# EAGLE board tulip breakout (EAGLE 9.6.2)
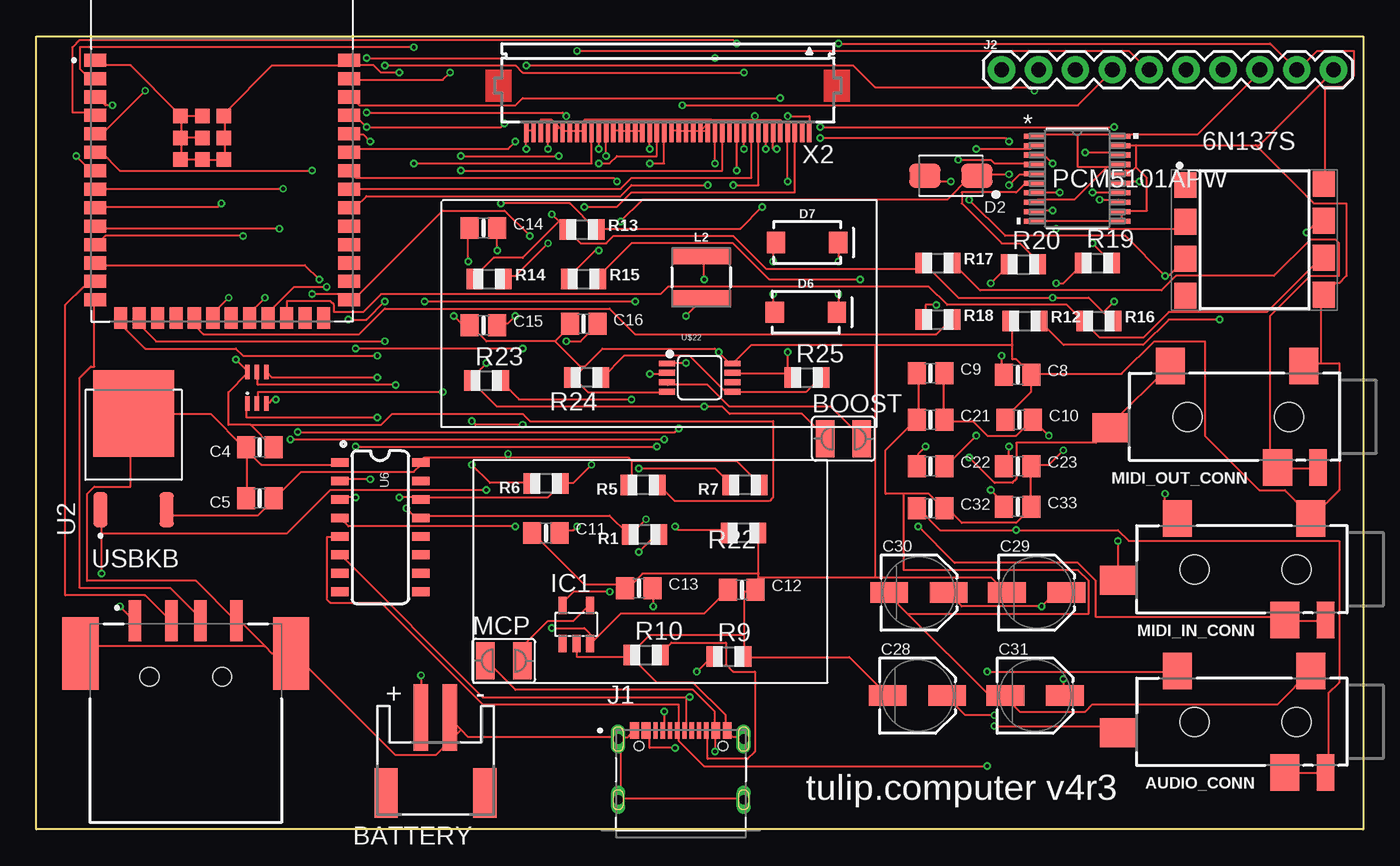
[diagram p0: board, top side]
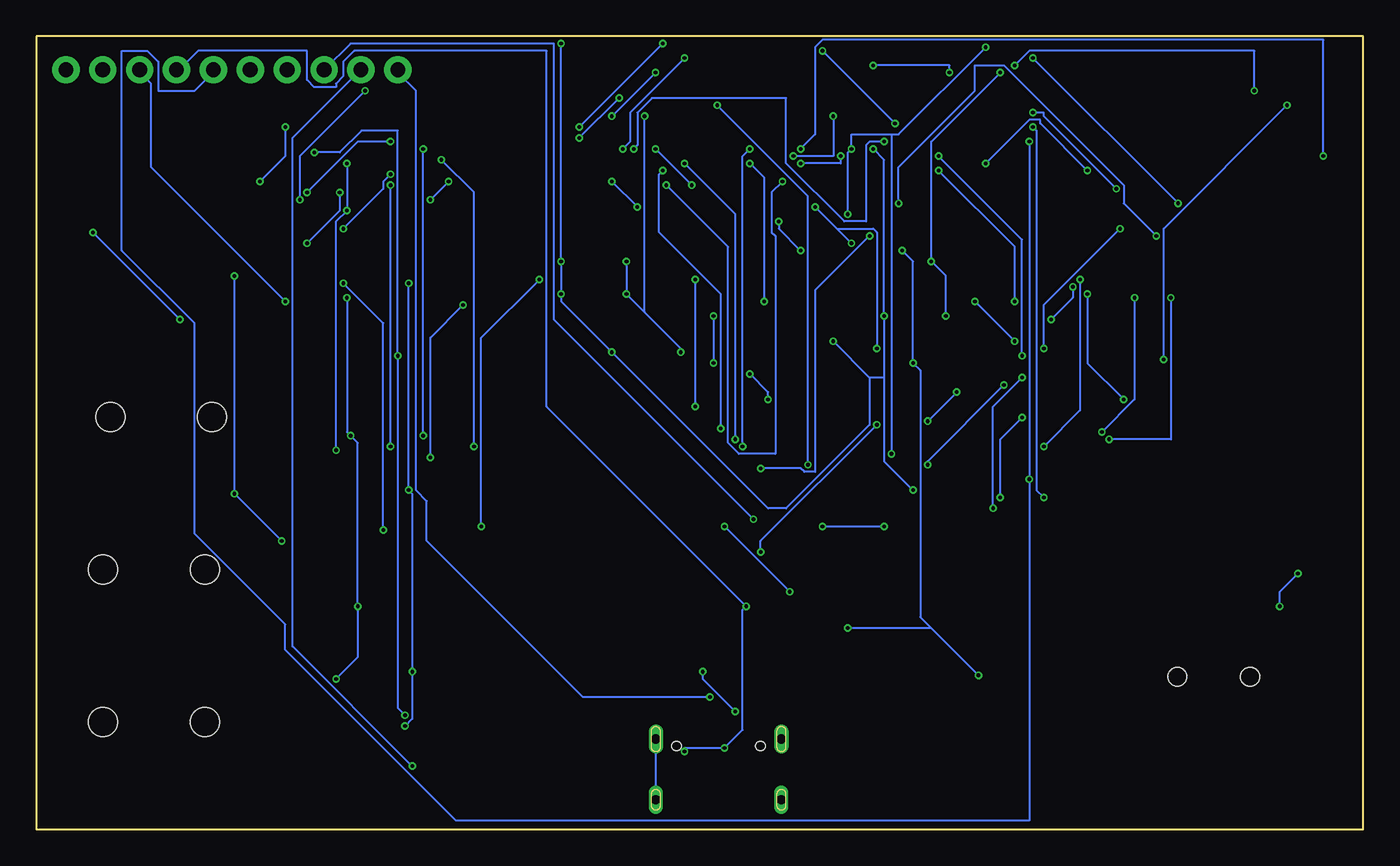
[diagram p1: board, bottom side, seen from below]

Size 91.4 x 54.6 mm. Coordinates in mm from the lower left corner, seen from the top.
Outline: 0,0 0,54.6 91.4,54.6 91.4,0 0,0
Copper layers (1*16): Top 0.035559375mm / dielectric 1.6mm / Bottom 0.035559375mm
Design rules "oshpark-2layer *": minimum track width 6mil, minimum drill 10mil, track to track 6mil, track to pad 6mil, pad to pad 6mil, via to via 6mil, smd to smd 6mil, copper to edge 0mil, drill to drill 6mil, minimum pad ring 5mil, minimum via ring 5mil, stop-mask expansion 2.5mil, vias tented up to drill 0mil, thermal gap 10mil
Net classes: 1 power: width 0.178 mm

## Footprints (pad centres in the part's own frame; a part is rotated, then mirrored left to right if it is on the bottom)
8-SMD = smd 1.52 x 1.78: 1 -4.96,3.96; 2 -4.96,1.42; 3 -4.96,-1.12; 4 -4.96,-3.66; 5 4.58,-3.59; 6 4.58,-1.05; 7 4.58,1.49; 8 4.58,4.03
4UCONN_19269 = smd 2 x 2.5: 1 2.5,-3.5; 2 11.7,-3.5; 3 4.3,3.5 | smd 2.5 x 2: 4 15.8,0.75 | smd 1.2 x 2.5: 5 1.5,3.5 | hole 2: 3.5,0; 10.5,0
JST-PH-2-SMT-RA = smd 1 x 4.6: 1 1,-3.7; 2 -1,-3.7 | smd 1.6 x 3.4: NC1 -3.4,1.5; NC2 3.4,1.5
SJW = smd 1.27 x 2.54: 1 -1.27,0; 2 1.27,0
0805-NO = smd 1.24 x 1.5: 1 -0.95,0; 2 0.95,0
PANASONIC_C = smd 2.6 x 1.4: + 2.05,0; - -2.05,0
DIOM449X264X300L114X135N = smd 2.17 x 1.69: A 1.795,0; C -1.795,0
SMA-DIODE = smd 1.27 x 1.47: A -2.15,0; C 2.15,0
SOT23-5L = smd 0.55 x 1.2: 1 -0.95,-1.3; 2 0,-1.3; 3 0.95,-1.3; 4 0.95,1.3; 5 -0.95,1.3
VALCON_CSP-USC16-TR = smd 0.3 x 1.14: A1 -3.35,0; A4 -2.55,0; A5 -1.25,0; A6 -0.25,0; A7 0.25,0; A8 1.25,0; A9 2.55,0; A12 3.35,0; B1 3.05,0; B4 2.25,0; B5 1.75,0; B6 0.75,0; B7 -0.75,0; B8 -1.75,0; B9 -2.25,0; B12 -3.05,0 | drill 0.65 pad 1 long: S1 -4.325,-0.59; S2 4.325,-0.59 | drill 0.65 pad 0.9 long: S3 -4.325,-4.77; S4 4.325,-4.77 | hole 0.65: -2.89,-1.07; 2.89,-1.07
1X10 = drill 1.016 pad 1.88: 1 0,0; 2 2.54,0; 3 5.08,0; 4 7.62,0; 5 10.16,0; 6 12.7,0; 7 15.24,0; 8 17.78,0; 9 20.32,0; 10 22.86,0
INDUCTOR_4X4MM = smd 4.089 x 1.143: P$1 0,1.473; P$2 0,-1.473
R0805 = smd 1.1 x 1.4: 1 -1,0; 2 1,0
SOT236 = smd 0.3 x 1: 1 -0.66,-1.09; 2 0,-1.09; 3 0.66,-1.09; 4 0.66,1.09; 5 0,1.09; 6 -0.66,1.09
XCVR_ESP32-S3-WROOM-2-N32R8V = smd 1.5 x 0.9: 1 -8.75,5.26; 2 -8.75,3.99; 3 -8.75,2.72; 4 -8.75,1.45; 5 -8.75,0.18; 6 -8.75,-1.09; 7 -8.75,-2.36; 8 -8.75,-3.63; 9 -8.75,-4.9; 10 -8.75,-6.17; 11 -8.75,-7.44; 12 -8.75,-8.71; 13 -8.75,-9.98; 14 -8.75,-11.25; 27 8.75,-11.25; 28 8.75,-9.98; 29 8.75,-8.71; 30 8.75,-7.44; 31 8.75,-6.17; 32 8.75,-4.9; 33 8.75,-3.63; 34 8.75,-2.36; 35 8.75,-1.09; 36 8.75,0.18; 37 8.75,1.45; 38 8.75,2.72; 39 8.75,3.99; 40 8.75,5.26 | smd 0.9 x 1.5: 15 -6.985,-12.5; 16 -5.715,-12.5; 17 -4.445,-12.5; 18 -3.175,-12.5; 19 -1.905,-12.5; 20 -0.635,-12.5; 21 0.635,-12.5; 22 1.905,-12.5; 23 3.175,-12.5; 24 4.445,-12.5; 25 5.715,-12.5; 26 6.985,-12.5 | smd 1 x 1: 41_1 -1.36,-0.09; 41_2 -2.86,-0.09; 41_3 0.14,-0.09; 41_4 -2.86,-1.59; 41_5 -1.36,-1.59; 41_6 0.14,-1.59; 41_7 -2.86,1.41; 41_8 -1.36,1.41; 41_9 0.14,1.41
DPAK456P972X240-3N = smd 2.4 x 0.98: 1 -4.2,2.28; 2 -4.2,-2.28 | smd 5.96 x 5.57: 3 2.42,0
PW20_TEX = smd 1.473 x 0.356: 1 -2.921,2.925; 2 -2.921,2.275; 3 -2.921,1.625; 4 -2.921,0.975; 5 -2.921,0.325; 6 -2.921,-0.325; 7 -2.921,-0.975; 8 -2.921,-1.625; 9 -2.921,-2.275; 10 -2.921,-2.925; 11 2.921,-2.925; 12 2.921,-2.275; 13 2.921,-1.625; 14 2.921,-0.975; 15 2.921,-0.325; 16 2.921,0.325; 17 2.921,0.975; 18 2.921,1.625; 19 2.921,2.275; 20 2.921,2.925
SO016 = smd 0.6 x 1.2: 1 -4.445,-2.8; 2 -3.175,-2.8; 3 -1.905,-2.8; 4 -0.635,-2.8; 5 0.635,-2.8; 6 1.905,-2.8; 7 3.175,-2.8; 8 4.445,-2.8; 9 4.445,2.8; 10 3.175,2.8; 11 1.905,2.8; 12 0.635,2.8; 13 -0.635,2.8; 14 -1.905,2.8; 15 -3.175,2.8; 16 -4.445,2.8
MSOP8 = smd 0.4 x 1.1: 1 -0.975,-2.25; 2 -0.325,-2.25; 3 0.325,-2.25; 4 0.975,-2.25; 5 0.975,2.25; 6 0.325,2.25; 7 -0.325,2.25; 8 -0.975,2.25
SAMTEC_USB-A-S-X-X-SM2 = smd 0.9 x 2.8: 01 -3.5,3.85; 02 -1,3.85; 03 1,3.85; 04 3.5,3.85 | smd 2.5 x 5: S1 -7.25,1.6; S2 7.25,1.6 | hole 1.3: -2.5,0; 2.5,0
FH12-40S-0.5SH = smd 0.3 x 1.3: 1 -9.75,3.25; 2 -9.25,3.25; 3 -8.75,3.25; 4 -8.25,3.25; 5 -7.75,3.25; 6 -7.25,3.25; 7 -6.75,3.25; 8 -6.25,3.25; 9 -5.75,3.25; 10 -5.25,3.25; 11 -4.75,3.25; 12 -4.25,3.25; 13 -3.75,3.25; 14 -3.25,3.25; 15 -2.75,3.25; 16 -2.25,3.25; 17 -1.75,3.25; 18 -1.25,3.25; 19 -0.75,3.25; 20 -0.25,3.25; 21 0.25,3.25; 22 0.75,3.25; 23 1.25,3.25; 24 1.75,3.25; 25 2.25,3.25; 26 2.75,3.25; 27 3.25,3.25; 28 3.75,3.25; 29 4.25,3.25; 30 4.75,3.25; 31 5.25,3.25; 32 5.75,3.25; 33 6.25,3.25; 34 6.75,3.25; 35 7.25,3.25; 36 7.75,3.25; 37 8.25,3.25; 38 8.75,3.25; 39 9.25,3.25; 40 9.75,3.25

## Placement (x,y rotation side)
6N137S  6N137S  [8-SMD]  84.1,40.4 0 top
AUDIO_CONN  19269  [4UCONN_19269]  90.3,7.4 180 top
BATTERY  [JST-PH-2-SMT-RA]  27.5,4 180 top
BOOST  [SJW]  55.6,26.9 0 top
C4  4.7uF  [0805-NO]  15.4,26.3 180 top
C5  4.7uF  [0805-NO]  15.4,22.8 180 top
C8  0.1uF  [0805-NO]  67.6,31.3 0 top
C9  0.1uF  [0805-NO]  61.6,31.4 0 top
C10  0.1uF  [0805-NO]  67.7,28.2 0 top
C11  10nF  [0805-NO]  35.1,20.4 0 top
C12  4.7uF  [0805-NO]  48.6,16.5 0 top
C13  4.7uF  [0805-NO]  41.5,16.6 0 top
C14  22uF  [0805-NO]  30.8,41.4 0 top
C15  22uF  [0805-NO]  30.8,34.7 0 top
C16  22uF  [0805-NO]  37.7,34.8 0 top
C21  0.1uF  [0805-NO]  61.6,28.2 0 top
C22  2.2uF  [0805-NO]  61.6,25 0 top
C23  2.2uF  [0805-NO]  67.6,25 0 top
C28  10uF  [PANASONIC_C]  60.7,9.2 0 top
C29  10uF  [PANASONIC_C]  68.9,16.3 0 top
C30  10uF  [PANASONIC_C]  60.8,16.3 0 top
C31  10uF  [PANASONIC_C]  68.8,9.2 0 top
C32  2.2nF  [0805-NO]  61.6,22.1 0 top
C33  2.2nF  [0805-NO]  67.6,22.2 0 top
D2  EGF1A  [DIOM449X264X300L114X135N]  63,45 180 top
D6  3A/40V/500mV  [SMA-DIODE]  53,35.6 0 top
D7  3A/40V/500mV  [SMA-DIODE]  53.1,40.4 0 top
IC1  MCP73831/OT  [SOT23-5L]  37.2,14.1 0 top
J1  CSP-USC16-TR  [VALCON_CSP-USC16-TR]  44.4,6.8 0 top
J2  [1X10]  66.5,52.3 0 top
L2  2.2UH3A  [INDUCTOR_4X4MM]  45.8,38 0 top
MCP  [SJW]  32.2,11.6 0 top
MIDI_IN_CONN  19269  [4UCONN_19269]  90.3,17.9 180 top
MIDI_OUT_CONN  19269  [4UCONN_19269]  89.8,28.4 180 top
R1  100k  [R0805]  41.9,20.3 180 top
R5  10k  [R0805]  41.8,23.7 180 top
R6  100k  [R0805]  35.1,23.8 180 top
R7  10k  [R0805]  48.8,23.7 180 top
R9  5.1K  [R0805]  47.7,11.9 0 top
R10  5.1K  [R0805]  42,12 0 top
R12  4.7K  [R0805]  68.1,35 0 top
R13  4.7K  [R0805]  37.6,41.3 0 top
R14  4.7K  [R0805]  31.2,37.9 0 top
R15  220  [R0805]  37.7,37.9 0 top
R16  470  [R0805]  73.2,35 0 top
R17  33  [R0805]  62.1,39 0 top
R18  10  [R0805]  62.1,35.1 0 top
R19  470  [R0805]  73.1,39 0 top
R20  470  [R0805]  68,38.9 0 top
R22  2.0K  [R0805]  48.7,20.4 180 top
R23  750K  [R0805]  31,30.9 0 top
R24  100K  [R0805]  37.9,31.1 180 top
R25  750K  [R0805]  53.1,31.1 0 top
RESET  MBT3904DW1T1G  [SOT236]  15.2,30.4 0 top
U1  ESP32-S3-WROOM-2-N32R8V  [XCVR_ESP32-S3-WROOM-2-N32R8V]  12.8,47.7 0 top
U2  LD29150DT33R  [DPAK456P972X240-3N]  6.7,26.2 90 top
U3  PCM5101APW  [PW20_TEX]  71.7,44.8 0 top
U6  CH340C  [SO016]  23.7,20.8 270 top
U$22  PAM2401  [MSOP8]  45.7,31.1 270 top
USBKB  USB-A-S-X-X-SM2  [SAMTEC_USB-A-S-X-X-SM2]  10.3,10.5 0 top
X2  FH12-40S-0.5SH  [FH12-40S-0.5SH]  43.5,51.2 180 top

## Library data of the parts
6N137S = 6N137S; AVAILABILITY: In Stock; DESCRIPTION: Logic Output Optoisolator 15MBd Open Collector 5000Vrms 1 Channel 10kV/µs CMTI 8-SMD; MF: Lite-On Inc.; MP: 6N137S; PACKAGE: SMD-8 Lite-On Inc.; PRICE: None; PURCHASE-URL: https://pricing.snapeda.com/search/part/6N137S/?ref=eda
AUDIO_CONN C4 C5 C8-C16 C21-C23 C28-C33 MIDI_IN_CONN MIDI_OUT_CONN = microbuilder
BATTERY IC1 R1 R5-R7 R9 R10 R12-R20 R22-R25 = adafruit
BOOST MCP = jumper
D2 = EGF1A; AVAILABILITY: In Stock; DESCRIPTION: Diode Standard 50 V 1A Surface Mount DO-214AC (SMA); MF: ON Semiconductor; MP: EGF1A; PACKAGE: SMA-2 ON Semiconductor; PRICE: None; PURCHASE-URL: https://pricing.snapeda.com/search/part/EGF1A/?ref=eda
D6 D7 = SparkFun-DiscreteSemi; PROD_ID: DIO-09886
J1 = CSP-USC16-TR; AVAILABILITY: In Stock; DESCRIPTION: CSP-USC16-TR Valcon USB Type C Surface Mount PCB Socket; MF: Valcon; MP: CSP-USC16-TR; PACKAGE: None; PRICE: None; PURCHASE-URL: https://pricing.snapeda.com/search/part/CSP-USC16-TR/?ref=eda
J2 = SparkFun-Connectors; PROD_ID: CONN-11563
L2 = SparkFun-Coils; PROD_ID: NDUC-13770
RESET = MBT3904DW1T1G; AVAILABILITY: In Stock; DESCRIPTION: Bipolar (BJT) Transistor Array 2 NPN (Dual) 40V 200mA 300MHz 150mW Surface Mount SC-88/SC70-6/SOT-363; MF: ON Semiconductor; MP: MBT3904DW1T1G; PACKAGE: SC-88-6 ON Semiconductor; PRICE: None; PURCHASE-URL: https://pricing.snapeda.com/search/part/MBT3904DW1T1G/?ref=eda
U1 = ESP32-S3-WROOM-2-N32R8V; AVAILABILITY: In Stock; DESCRIPTION: Bluetooth, WiFi 802.11b/g/n, Bluetooth v5.0 Transceiver Module 2.4GHz PCB Trace Surface Mount; MF: Espressif Systems; MP: ESP32-S3-WROOM-2-N32R8V; PACKAGE: Package; PRICE: None; PURCHASE-URL: https://pricing.snapeda.com/search/part/ESP32-S3-WROOM-2-N32R8V/?ref=eda
U2 = LD29150DT33R; DESCRIPTION: Linear Voltage Regulator IC Positive Fixed 1 Output 1.5A DPAK; DIGI-KEY_PART_NUMBER: 497-1496-2-ND; MF: STMicroelectronics; MP: LD29150DT33R; PACKAGE: TO-252 STMicroelectronics; PURCHASE-URL: https://pricing.snapeda.com/search/part/LD29150DT33R/?ref=eda
U3 = pcm5101apw; COPYRIGHT: Copyright (C) 2022 Ultra Librarian. All rights reserved.; DIGI-KEY_PART_NUMBER_1: PCM5101APW-ND; MANUFACTURER_PART_NUMBER: PCM5101APW; MFR_NAME: Texas Instruments
U6 = SparkFun-IC-Comms; PROD_ID: IC-14038
U$22 = SparkFun-IC-Power; PROD_ID: IC-XXXXX
USBKB = USB-A-S-X-X-SM2; AVAILABILITY: In Stock; DESCRIPTION: USB-A (USB TYPE-A) USB 2.0 Receptacle Connector 4 Position Surface Mount, Right Angle; MF: Samtec; MP: USB-A-S-F-W-SM2-TR; PACKAGE: None; PRICE: None; PURCHASE-URL: https://pricing.snapeda.com/search/part/USB-A-S-F-W-SM2-TR/?ref=eda
X2 = con-hirose; MPN: FH12-40S-0.5SH(55); OC_FARNELL: 1324556; OC_NEWARK: 34M6178

## Nets
3V3: C5.1 C9.2 C10.2 C21.2 C29.+ C30.+ C31.+ J2.8 R5.2 R7.1 R13.1 R14.1 R16.2 R17.1 U1.2 U2.2 U3.1 U3.8 U3.17 U3.20 U6.16 X2.37
5V: 6N137S.8 C15.2 C16.2 D6.C D7.C J2.9 R25.1 U2.1 U$22.7 USBKB.01 X2.39 X2.40
5V_USB: C13.2 J1.A4 J1.A9 J1.B4 J1.B9 J2.7 MCP.1
!DTR: J2.3 R1.2 RESET.4 U6.13
!RTS: J2.4 R6.1 RESET.1 U6.14
AGND: AUDIO_CONN.1 C9.1 C21.1 C23.2 C30.- C31.- C32.2 C33.2 U3.3 U3.9
B6: U1.20 X2.14
B7: U1.23 X2.13
BCLK: U1.39 U3.13
BLEN: U1.32 X2.10
D+: U1.14 USBKB.03
D-: U1.13 USBKB.02
DE: U1.35 X2.7
DIN: U1.38 U3.14
DN1: J1.A7 J2.1 U6.6
DP1: J1.A6 J2.2 U6.5
ESP32_EN: C4.1 R5.1 RESET.6 U1.3
G5: U1.12 X2.23
G6: U1.15 X2.22
G7: U1.16 X2.21
GND: 6N137S.5 BATTERY.2 C4.2 C5.2 C8.2 C10.1 C11.1 C12.2 C13.1 C14.1 C15.1 C16.1 C28.- C29.- D6.A D7.A IC1.2 J1.A1 J1.A12 J1.B1 J1.B12 J1.S1 J1.S2 J1.S3 J1.S4 J2.10 MIDI_IN_CONN.1 MIDI_OUT_CONN.1 R9.2 R10.1 R12.1 R22.1 R24.2 U1.1 U1.40 U1.41_1 U1.41_2 U1.41_3 U1.41_4 U1.41_5 U1.41_6 U1.41_7 U1.41_8 U1.41_9 U2.3 U3.10 U3.11 U3.12 U3.16 U3.19 U6.1 U$22.4 U$22.8 USBKB.04 USBKB.S1 USBKB.S2 X2.5 X2.12 X2.15 X2.16 X2.17 X2.18 X2.19 X2.20 X2.24 X2.25 X2.26 X2.27 X2.28 X2.32 X2.33 X2.34 X2.35 X2.36 X2.38
GPIO10: U1.18
HSYNC: U1.33 X2.9
INT: U1.5 X2.1
IO0: R7.2 RESET.3 U1.27
LOUT: AUDIO_CONN.2 AUDIO_CONN.4 C33.1 R20.1
LRC: U1.4 U3.15
MIDI_IN: 6N137S.6 R16.1 U1.24
MIDI_IN_SINK: 6N137S.3 D2.A MIDI_IN_CONN.2 MIDI_IN_CONN.4
MIDI_IN_SOURCE: MIDI_IN_CONN.3 MIDI_IN_CONN.5 R15.2
MIDI_OUT: R18.2 U1.19
MIDI_OUT_SINK: MIDI_OUT_CONN.2 MIDI_OUT_CONN.4 R18.1
MIDI_OUT_SOURCE: MIDI_OUT_CONN.3 MIDI_OUT_CONN.5 R17.2
N$1: R1.1 RESET.2
N$2: R6.2 RESET.5
N$3: J1.B5 R10.2
N$4: IC1.4 MCP.2
N$5: BOOST.2 U$22.3
N$7: C8.1 C28.+ U3.18
N$8: R19.2 U3.7
N$16: C22.1 U3.4
N$17: L2.P$2 U$22.1
N$18: C22.2 U3.2
N$19: R24.1 R25.2 U$22.5
N$20: IC1.5 R22.2
N$22: R23.2 U$22.2
N$30: 6N137S.2 D2.C R15.1
N$32: 6N137S.7 R12.2
N$38: C11.2 U6.4
N$42: J1.A5 R9.1
OUTL: R20.2 U3.6
PCLK: U1.22 X2.11
PWM: U1.9 X2.6
PWR: U1.17
R5: U1.6 X2.31
R6: U1.7 X2.30
R7: U1.8 X2.29
ROUT: AUDIO_CONN.3 AUDIO_CONN.5 C32.1 R19.1
SCL: R14.2 U1.10 X2.3
SDA: R13.2 U1.11 X2.4
UART0_RXD: J2.6 U1.36 U6.2
UART0_TXD: J2.5 U1.37 U6.3
VBATT: BATTERY.1 BOOST.1 C12.1 C14.2 IC1.3 L2.P$1 R23.1
VNEG: C23.1 U3.5
VSYNC: U1.34 X2.8

## Tracks (layer width: path | path; a pad name or v marks a point on that pad's centre or on a via)
3V3  (via drill 0.25)
  Top 0.152: 41,25.35 41,23.85 R5.2 | 41,25.35 48.25,25.35 49.75,23.85 R7.1 | U2.2 9,21.85 9.25,21.6 15.25,21.6 16.25,22.6 C5.1 16.5,22.85 18.25,24.6 26,24.6 26.5,25.1 U6.16 26.5,25.35 26.75,25.6 32.5,25.6 | 41,25.35 40.75,25.6 32.5,25.6 | C9.2 62.5,31.35 62.5,28.35 C21.2 62.75,28.1 64.5,28.1 65.5,27.1 67.5,27.1 68.5,28.1 C10.2 v69.75,27.1 | v70.75,10.35 70.75,9.35 C31.+ | C29.+ 70.75,16.1 70,16.1 v69.25,15.35 63.75,15.35 63,16.1 C30.+ | 71.75,47.85 69,47.85 U3.1 | 71.75,47.85 74.5,47.85 U3.20 74.75,47.85 80,47.85 84.25,52.1 J2.8 | 73.75,45.6 71.5,43.35 69,43.35 U3.8 | 73.75,45.6 74.5,45.6 U3.17 | 71.75,47.85 71.75,45.6 73.75,45.6 | 73.5,35.6 72.5,36.6 v70,36.6 63.5,36.6 R17.1 61,38.85 60.75,38.6 50.25,38.6 48,40.85 39.75,40.85 39.25,40.35 37.5,40.35 36.75,41.1 R13.1 36.5,41.35 36,41.85 | 73.5,35.6 74,35.1 R16.2 | v35.25,46.85 X2.37 | 36,41.85 v35.5,42.35 | 36,41.85 33.5,39.35 31.5,39.35 30.25,38.1 R14.1 | v26,53.85 3,53.85 3,52.35 3.25,52.1 3.75,52.1 4,51.85 U1.2 | 73.5,35.6 v74.25,36.35 | v32.5,25.85 32.5,25.6
  Bottom 0.152: v70.75,10.35 69.25,11.85 v69.25,15.35 69.25,26.6 v69.75,27.1 70,27.35 v70,36.6 | v35.5,42.35 35.5,46.6 v35.25,46.85 35.25,47.85 32.5,47.85 | v26,53.85 32,47.85 32.5,47.85 | v74.25,36.35 83.5,45.6 83.5,51.35 84.25,52.1 J2.8 | 32.5,47.85 v32.5,25.85
5V  (via drill 0.25)
  Top 0.152: 6N137S.8 88.75,44.6 88.75,51.1 90,51.1 90.75,51.85 90.75,53.6 88.25,53.6 87,52.35 J2.9 86.75,52.35 85,54.1 v55.25,54.1 | 51.75,31.35 48,31.35 U$22.7 | 51.75,31.35 52,31.1 R25.1 51.75,31.35 | v55.25,36.85 55.25,35.6 D6.C | D7.C v55.25,39.1 | v51.75,32.85 51.75,31.35 | v4.5,17.6 4.5,20.35 | 4.5,20.35 4.5,21.85 U2.1 | v5.75,15.35 6.75,14.35 USBKB.01 | X2.39 34.25,48.1 33.75,48.1 X2.40 v33.75,46.85 | v33,35.35 32.5,34.85 31.75,34.85 C15.2 | v36.5,33.6 37.5,33.6 38.5,34.6 C16.2 | 4.5,20.35 17.25,20.35 20.25,23.35 v31,23.35
  Bottom 0.152: v55.25,54.1 v55.25,39.1 v55.25,36.85 55.25,36.35 v51.75,32.85 41,22.1 39.75,22.1 34,27.85 34,31.1 | v4.5,17.6 5.75,16.35 v5.75,15.35 | v33.75,46.85 33,46.1 v33,35.35 33,31.1 | 34,31.1 v36.5,33.6 | 33,31.1 34,31.1 | v31,23.35 33,25.35 33,31.1
5V_USB  (via drill 0.25)
  Top 0.152: J1.A4 41.75,6.85 42.25,6.85 J1.B9 42.25,6.6 42.25,5.6 v44,5.6 | 46.75,6.85 47,6.85 J1.A9 | v46.75,5.35 46.75,6.6 J1.B4 46.75,6.85 | v42.5,15.35 42.5,16.6 C13.2 | 46.75,6.85 46.75,8.1 45.25,9.6 33,9.6 31,11.6 MCP.1
  Bottom 0.152: v46.75,5.35 46.75,5.6 v44,5.6 42.75,6.85 42.75,15.1 v42.5,15.35 56.25,29.1 56.25,53.6 69.5,53.6 70.25,52.85 70.25,51.85 70.75,51.35 70.75,51.1 72.25,51.1 72.75,51.6 72.75,53.6 80.25,53.6 81.5,52.35 J2.7
!DTR  (via drill 0.25)
  Top 0.152: RESET.4 16.25,31.1 v23.5,31.1 | v25.5,22.1 26,21.6 26.5,21.6 | 26.5,21.6 39.5,21.6 40.75,20.35 R1.2 41,20.35 v42,21.35 | 26.5,21.6 U6.13
  Bottom 0.152: v23.5,31.1 25.5,29.1 v25.5,22.1 | v42,21.35 55.75,35.1 55.75,54.1 69.75,54.1 71.5,52.35 J2.3
!RTS  (via drill 0.25)
  Top 0.152: v23.5,28.35 14.5,28.35 14.5,29.1 RESET.1 | 26.5,22.85 v25,22.85 | 26.5,22.85 35.25,22.85 36,23.6 R6.1 36.25,23.85 37,23.85 v38.25,25.1 | 26.5,22.85 U6.14 | v44.5,49.85 71.75,49.85 74,52.1 J2.4
  Bottom 0.152: v23.5,28.35 25,26.85 v25,22.85 | v44.5,49.85 38.25,43.6 v38.25,25.1
AGND  (via drill 0.25)
  Top 0.152: v70,42.6 69,42.6 U3.9 | v70,45.85 69.5,46.35 69,46.35 U3.3 | C9.1 60.75,31.35 60.75,28.35 C21.1 60.5,28.1 58.5,26.1 58.5,23.1 59.75,23.1 | 59.75,23.1 61.5,23.1 62.5,22.1 C32.2 62.75,22.1 63.75,21.1 67.5,21.1 68.5,22.1 C33.2 68.5,22.35 68.5,24.85 C23.2 68.75,25.1 69.75,25.1 v70.75,26.1 | AUDIO_CONN.1 85.5,8.6 72.75,8.6 72.25,8.1 67.75,8.1 66.75,9.1 C31.- 66.75,9.35 65.5,9.35 60,14.85 | 60,14.85 58.75,16.1 C30.- | 59.75,23.1 59.75,17.85 71.75,17.85 72.5,17.1 72.5,14.85 60,14.85
  Bottom 0.152: v70,45.85 v70,42.6 70.75,41.85 v70.75,26.1
B6  (via drill 0.25)
  Top 0.152: v46.75,45.85 X2.14 | v17.5,26.85 v43.25,26.85 | v13.25,36.6 12,35.35 U1.20
  Bottom 0.152: v46.75,45.85 43.25,42.35 v43.25,26.85 | v17.5,26.85 13.25,26.85 v13.25,36.6
B7  (via drill 0.25)
  Top 0.152: X2.13 47.25,45.35 v29.25,45.35 | v24,36.35 22.75,35.1 v21.5,35.1 | v20,37.35 17.75,37.35 15.75,35.35 U1.23
  Bottom 0.152: v29.25,45.35 24,40.1 v24,36.35 | v21.5,35.1 20,36.6 v20,37.35
BCLK  (via drill 0.25)
  Top 0.152: v73.25,43.35 74.5,43.35 U3.13 | v68.75,50.85 68.5,51.1 57.75,51.1 56.25,52.6 v33.75,52.6 | v28.5,52.1 28,51.6 21.75,51.6 U1.39
  Bottom 0.152: v73.25,43.35 73.25,46.35 v68.75,50.85 | v33.75,52.6 28.5,52.6 v28.5,52.1
BLEN  (via drill 0.25)
  Top 0.152: v48.75,46.85 X2.10 | v46.25,44.35 41,44.35 40.25,43.6 22.75,43.6 22,42.85 21.75,42.85 U1.32
  Bottom 0.152: v46.25,44.35 v48.75,46.85
D+
  Top 0.152: U1.14 4,36.35 4,31.85 3.75,31.85 3,31.1 3,16.6 9.25,16.6 11.5,14.35 USBKB.03
D-
  Top 0.152: U1.13 4,37.6 3.75,37.35 3.25,37.35 2,36.1 2,16.1 7.5,16.1 9.25,14.35 USBKB.02
DE  (via drill 0.25)
  Top 0.152: v50.25,46.85 X2.7 | v33,47.35 32.5,46.85 21.75,46.85 U1.35
  Bottom 0.152: v50.25,46.85 50,47.1 50,49.35 49,50.35 39.75,50.35 39.75,45.85 35.75,41.85 34.25,41.85 34.25,47.1 34,47.35 v33,47.35
DIN  (via drill 0.25)
  Top 0.152: v72.75,43.85 74.5,43.85 U3.14 | v67,47.35 66.75,47.6 v54,47.6 | v51.25,50.35 33.5,50.35 33,49.85 22.25,49.85 21.75,50.35 U1.38
  Bottom 0.152: v72.75,43.85 69.25,47.35 v67,47.35 | v51.25,50.35 v54,47.6
DN1  (via drill 0.25)
  Top 0.152: 44.75,9.1 44.75,6.85 J1.A7 | 44.75,9.1 30.75,9.1 21,18.85 U6.6 | 44.75,9.1 v45,9.1
  Bottom 0.152: v45,9.1 53.75,9.1 64.5,19.85 64.5,22.6 65.25,23.35 65.25,50.85 66.5,52.1 J2.1
DP1  (via drill 0.25)
  Top 0.152: U6.5 20.75,20.1 20,20.1 20,15.85 20.25,15.6 23.75,15.6 30.75,8.6 44.25,8.6 44.25,6.85 J1.A6 44.25,6.6 44.25,6.1 46,4.35 v65.5,4.35
  Bottom 0.152: v65.5,4.35 73.75,12.6 73.75,47.6 69.25,52.1 J2.2
ESP32_EN  (via drill 0.25)
  Top 0.152: 14.75,27.85 13.25,27.85 13.25,30.1 14.5,31.35 RESET.6 14.5,31.6 v13.75,32.35 | 14.75,27.85 16.25,26.35 C4.1 | 14.75,27.85 23.75,27.85 24.5,28.6 33.5,28.6 34,28.1 50.75,28.1 50.75,22.85 50.5,22.6 44,22.6 43,23.6 R5.1 | v5.25,49.85 4.75,49.85 4.25,50.35 U1.3
  Bottom 0.152: v5.25,49.85 13.75,41.35 v13.75,32.35
G5  (via drill 0.25)
  Top 0.152: v42.25,46.85 X2.23 | v22,26.35 v42.75,26.35 | v19.5,37.85 18.5,38.85 4.25,38.85 U1.12
  Bottom 0.152: v42.25,46.85 42.75,46.35 v42.75,26.35 | v22,26.35 19.5,28.85 v19.5,37.85
G6  (via drill 0.25)
  Top 0.152: X2.22 42.75,46.35 40,46.35 39.5,45.85 v38.75,45.85 | v29.25,46.35 v36,46.35 | v23.5,32.6 14.25,32.6 13.75,33.1 7.5,33.1 6,34.6 6,35.1 U1.15
  Bottom 0.152: v38.75,45.85 36,45.85 v36,46.35 | v29.25,46.35 23.5,40.6 v23.5,32.6
G7  (via drill 0.25)
  Top 0.152: X2.21 43.25,45.85 v42.25,45.85 | v26.75,36.35 v41.25,36.35 | v24,33.6 8.25,33.6 7.25,34.6 7.25,35.1 U1.16
  Bottom 0.152: v42.25,45.85 41.25,44.85 v41.25,36.35 | v24,33.6 v26.75,36.35
GND  (via drill 0.25)
  Top 0.152: C11.1 34.25,20.35 37.75,16.85 40.25,16.85 40.5,16.6 C13.1 40.75,16.6 41.75,17.6 49.75,17.6 | 41,11.85 37.25,11.85 37.25,12.6 IC1.2 | 48.75,13.35 48.75,16.35 49.5,16.35 C12.2 49.75,16.6 49.75,17.35 | 48.75,13.35 48.75,12.1 R9.2 48.75,11.85 56,11.85 C28.- | 49.75,17.35 49.75,17.6 | 49.75,17.6 49.75,20.35 R22.1 | 49.75,17.35 57.75,17.35 | 57.75,17.35 65.75,17.35 66.75,16.35 C29.- | 48.75,13.35 42.25,13.35 41,12.1 R10.1 41,11.85 | 14.5,26.1 15.5,25.1 20.75,25.1 U6.1 | 14.5,26.1 14.5,22.85 C5.2 | 14.5,26.1 C4.2 14.25,26.35 12,28.6 6.75,28.6 U2.3 6.5,28.6 6.5,23.6 4,23.6 3.5,23.1 3.5,17.1 11,17.1 13.75,14.35 USBKB.04 14,14.35 15.75,12.6 | 15.75,12.6 16.25,12.1 USBKB.S2 17.75,12.1 24.75,5.1 27.5,5.1 29.25,6.85 | 15.75,12.6 3.75,12.6 3.25,12.1 USBKB.S1 | J1.B12 41.25,6.85 41,6.85 J1.A1 41,6.6 40.75,6.35 40.25,6.35 J1.S1 | 40.25,2.1 40.25,6.1 J1.S1 | 47.5,6.85 47.75,6.85 J1.A12 47.75,6.6 48,6.35 48.5,6.35 J1.S2 | 40.25,2.1 48.5,2.1 J1.S4 | 40.25,2.1 J1.S3 | 29.25,6.85 29.75,6.35 40,6.35 J1.S1 | 29.25,6.85 28.5,7.6 BATTERY.2 | 41,11.85 42.75,10.1 45.25,10.1 47.5,7.85 47.5,6.85 | 47.5,6.85 J1.B1 | 88.5,32.1 88.5,36.6 6N137S.5 88.75,36.85 89.5,37.6 89.75,37.6 90.25,38.1 90.25,43.1 88,43.1 84,47.1 | 88.5,32.1 87.5,32.1 MIDI_OUT_CONN.1 | 88.5,32.1 89.75,32.1 89.75,23.35 MIDI_IN_CONN.1 87.75,21.6 86,23.35 84.25,23.35 80.5,27.1 80.5,33.6 77,33.6 74.75,31.35 68.75,31.35 C8.2 | 75.75,45.6 75.5,45.35 75,45.35 74.75,45.1 U3.16 | 75.75,47.1 75.75,45.6 | 75.75,47.1 74.75,47.1 U3.19 | U3.10 69,41.85 74.5,41.85 U3.11 74.75,41.85 74.75,42.35 U3.12 74.75,42.6 76.5,42.6 76.5,44.85 75.75,45.6
  Top 0.152: 75.75,47.1 84,47.1 | 84,47.1 84.25,47.1 89.25,52.1 J2.10 | 10,49.1 11.25,49.1 U1.41_8 | 10,47.6 11.25,47.6 U1.41_1 | 10,47.6 10,46.35 U1.41_4 10,46.1 11.25,46.1 U1.41_5 11.5,46.1 12.75,46.1 U1.41_6 13,46.35 13,47.6 U1.41_3 13,47.85 13,49.1 U1.41_9 13,49.35 16.25,52.6 21.25,52.6 21.5,52.85 U1.40 21.75,52.85 22,52.6 23.25,52.6 23.75,52.1 v25,52.1 | 10,47.6 U1.41_2 10,47.85 10,49.1 | 10,49.1 U1.41_7 9.75,49.35 6.5,52.6 4.5,52.6 4.25,52.85 U1.1 | X2.38 34.75,48.85 35.5,48.85 36,48.35 | 36.25,48.1 36,48.35 | 36,48.35 35.75,48.1 X2.36 | 36.25,48.1 36.75,48.1 | 36.25,48.1 X2.35 | 36.75,48.1 37.25,48.1 | 36.75,48.1 X2.34 | 37.25,48.1 37.75,48.1 | 37.25,48.1 X2.33 | 40.25,48.1 39.75,48.1 X2.28 | 40.25,48.1 40.75,48.1 | 40.25,48.1 X2.27 | 40.75,48.1 41.25,48.1 | 40.75,48.1 X2.26 | 41.25,48.1 41.75,48.1 | 41.25,48.1 X2.25 | 44.25,48.1 43.75,48.1 X2.20 | 44.25,48.1 44.75,48.1 | 44.25,48.1 X2.19 | 44.75,48.1 45.25,48.1 | 44.75,48.1 X2.18 | 45.25,48.1 45.75,48.1 | 45.25,48.1 X2.17 | 45.75,48.1 46.25,48.1 X2.15 | 47.75,48.85 X2.12 | 46.5,48.85 47.75,48.85 | 45.75,48.1 46.5,48.85 | 45.75,48.1 X2.16 | X2.5 51.25,48.85 49.5,48.85 | 47.75,48.85 49.5,48.85 | 41.75,48.85 41.75,48.1 | 46.5,48.85 41.75,48.85 | 41.75,48.1 X2.24 | 37.75,48.1 37.75,48.85 41.75,48.85 | 37.75,48.1 X2.32 | 35.75,33.6 31,33.6 30,34.6 C15.1 29.75,34.85 29.25,34.85 v28.75,35.35 | 35.75,33.6 36.75,34.6 C16.1 | v29.75,39.1 29.75,41.35 C14.1 | 67.25,33.35 67.25,32.35 67.5,32.35 C8.2 | 67.25,33.35 67.25,34.85 R12.1 | C10.1 66.75,28.35 68.5,30.1 68.5,31.1 C8.2 | v50.75,36.85 50.75,35.6 D6.A | v50.75,39.1 50.75,40.35 D7.A | 37,31.1 38,30.1 43.25,30.1 U$22.4 | 37,31.1 37.75,31.85 | 37.75,31.85 39,33.1 46.75,33.1 v47,32.85 47.75,32.1 U$22.8 48,32.1 49.25,33.35 57.75,33.35
  Top 0.152: 37,31.1 R24.2 | 57.75,33.35 67.25,33.35 | 35.75,33.6 37.5,31.85 37.75,31.85 | v49.5,49.1 49.5,48.85 | 57.75,33.35 57.75,17.35
  Bottom 0.152: J1.S4 48.75,2.1 48.75,6.1 J1.S2 | v28.75,35.35 28.75,38.1 v29.75,39.1 29.75,47.35 v25,52.1 | v50.75,39.1 v50.75,36.85 49.5,35.6 | 49.5,35.6 47,33.1 v47,32.85 | 49.5,35.6 v49.5,49.1
HSYNC
  Top 0.152: X2.9 49.25,44.85 41,44.85 40.25,44.1 21.75,44.1 U1.33
INT  (via drill 0.25)
  Top 0.152: X2.1 53.25,49.1 v51.75,49.1 | v48.75,52.1 33.5,52.1 33,52.6 v24,52.6 | v7.5,50.85 4.75,48.1 4.25,48.1 U1.5
  Bottom 0.152: v48.75,52.1 v51.75,49.1 | v24,52.6 23,53.6 7.5,53.6 v7.5,50.85
IO0  (via drill 0.25)
  Top 0.152: v16.5,29.6 16.25,29.6 16,29.35 RESET.3 | v19,36.85 21.25,36.85 21.5,36.6 U1.27 21.75,36.6 22,36.6 28,42.6 32.25,42.6 v34,40.85 | v41.5,24.85 46.75,24.85 47.75,23.85 R7.2
  Bottom 0.152: v16.5,29.6 19,32.1 v19,36.85 | v41.5,24.85 38.75,24.85 38.5,24.6 37.75,24.6 37.75,37.1 v34,40.85
LOUT  (via drill 0.25)
  Top 0.152: v65.75,37.6 67,38.85 R20.1 | v65.75,23.35 66.75,22.35 C33.1 | v66,7.1 74.25,7.1 74.5,6.85 AUDIO_CONN.4 | v65.5,10.85 78.5,10.85 AUDIO_CONN.2
  Bottom 0.152: v65.75,37.6 v65.75,23.35 65.5,23.1 v65.5,10.85 65.5,7.6 v66,7.1
LRC  (via drill 0.25)
  Top 0.152: v76,44.6 74.75,44.6 U3.15 | v54,48.35 v74.25,48.35 | v48.25,54.1 48,54.35 3,54.35 2.5,53.85 2.5,49.35 4,49.35 U1.4
  Bottom 0.152: v76,44.6 74.25,46.35 v74.25,48.35 | v48.25,54.1 v54,48.35
MIDI_IN
  Top 0.152: 6N137S.6 88.5,39.35 84.75,35.6 78,35.6 76.25,33.85 73.25,33.85 72.25,34.85 R16.1 72,35.1 71,36.1 62.75,36.1 61.5,37.35 43.5,37.35 43,36.85 23.75,36.85 22.5,35.6 20.5,35.6 20.5,36.1 20.25,36.35 17.25,36.35 17.25,35.35 U1.24
MIDI_IN_SINK  (via drill 0.25)
  Top 0.152: v77.75,23.1 77.75,21.6 78.5,21.6 MIDI_IN_CONN.2 | 6N137S.3 79,39.1 78,38.1 v77.75,38.1 75,40.85 66.75,40.85 v64.25,43.35 | v63,44.6 61.5,44.6 61.25,44.85 D2.A | v74.5,19.85 MIDI_IN_CONN.4
  Bottom 0.152: v77.75,38.1 v77.75,23.1 v74.5,19.85 | v64.25,43.35 v63,44.6
MIDI_IN_SOURCE  (via drill 0.25)
  Top 0.152: v56.75,37.85 50.5,37.85 48,40.35 41,40.35 38.75,38.1 R15.2 | v60.75,20.85 63.25,18.35 71.75,18.35 73,17.1 73,14.6 86,14.6 MIDI_IN_CONN.3 86,14.35 88.75,14.35 MIDI_IN_CONN.5
  Bottom 0.152: v56.75,37.85 60.75,33.85 v60.75,20.85
MIDI_OUT
  Top 0.152: R18.2 63,35.1 62,34.1 41.25,34.1 39.5,35.85 24,35.85 22.25,34.1 11.5,34.1 11,34.6 11,35.1 U1.19
MIDI_OUT_SINK  (via drill 0.25)
  Top 0.152: v62,36.1 61.25,36.1 61.25,35.1 R18.1 | v64.25,25.6 66,23.85 67.25,23.85 67.5,24.1 67.5,26.6 73,26.6 74,27.6 MIDI_OUT_CONN.4 74,27.85 78,31.85 MIDI_OUT_CONN.2
  Bottom 0.152: v62,36.1 64.25,33.85 v64.25,25.6
MIDI_OUT_SOURCE
  Top 0.152: R17.2 65,37.1 77.5,37.1 78.5,38.1 85.25,38.1 87.75,40.6 89.5,40.6 89.75,40.35 89.75,38.1 87.75,38.1 85,35.35 85,25.1 85.5,25.1 MIDI_OUT_CONN.3 85.5,24.85 88.25,24.85 MIDI_OUT_CONN.5
N$1  (via drill 0.25)
  Top 0.152: v28,30.1 15.25,30.1 15.25,29.35 RESET.2 | v30,28.1 30.25,27.85 v33.5,27.85 | v41.5,19.1 42.5,20.1 42.75,20.1 R1.1
  Bottom 0.152: v30,28.1 v28,30.1 | v33.5,27.85 41.5,19.85 v41.5,19.1
N$2  (via drill 0.25)
  Top 0.152: v24.75,30.6 15.25,30.6 15.25,31.35 RESET.5 | v30,25.1 31.25,23.85 34,23.85 R6.2
  Bottom 0.152: v24.75,30.6 30,25.35 v30,25.1
N$3
  Top 0.152: J1.B5 46.25,6.6 46.25,4.85 49,4.85 49.5,5.35 49.5,10.85 48,10.85 47.5,11.35 47.5,12.85 43.75,12.85 43,12.1 R10.2
N$4
  Top 0.152: IC1.4 38,15.35 37,14.35 35.25,14.35 33.5,12.6 33.5,11.6 MCP.2
N$5
  Top 0.152: U$22.3 43.5,30.6 46.25,30.6 47.75,29.1 54.75,29.1 56.75,27.1 BOOST.2
N$7  (via drill 0.25)
  Top 0.152: v72.25,46.6 74.5,46.6 U3.18 | v66.5,32.6 66.5,31.35 C8.1 | v66,7.85 64,7.85 62.75,9.1 C28.+
  Bottom 0.152: v72.25,46.6 70.5,46.6 69,48.1 66.5,48.1 v66.5,32.6 66.5,8.35 v66,7.85
N$8  (via drill 0.25)
  Top 0.152: v72.75,40.35 R19.2 | v70.5,43.85 69,43.85 U3.7
  Bottom 0.152: v72.75,40.35 70.5,42.6 v70.5,43.85
N$16  (via drill 0.25)
  Top 0.152: v63.5,46.1 65.75,46.1 66,45.85 68.75,45.85 U3.4 | v61.25,26.35 60.75,25.85 60.75,25.1 C22.1
  Bottom 0.152: v63.5,46.1 61.25,43.85 v61.25,26.35
N$17  (via drill 0.25)
  Top 0.152: v44.75,32.1 43.5,32.1 U$22.1 | v44.75,35.35 45.75,36.35 L2.P$2
  Bottom 0.152: v44.75,35.35 v44.75,32.1
N$18  (via drill 0.25)
  Top 0.152: v64.75,46.85 68.5,46.85 68.75,47.1 U3.2 | v64.75,27.1 62.75,25.1 C22.2
  Bottom 0.152: v64.75,27.1 v64.75,46.85
N$19
  Top 0.152: R25.2 54,31.1 53,30.1 48,30.1 U$22.5 47.75,30.1 47.5,30.1 45,32.6 40.5,32.6 39,31.1 R24.1
N$20  (via drill 0.25)
  Top 0.152: v39.5,16.35 37,16.35 36.25,15.6 IC1.5 | v44,20.85 44.25,20.6 47.5,20.6 R22.2
  Bottom 0.152: v44,20.85 v39.5,16.35
N$22  (via drill 0.25)
  Top 0.152: v42.25,31.35 43.25,31.35 U$22.2 | v41,29.6 33.25,29.6 32,30.85 R23.2
  Bottom 0.152: v42.25,31.35 41,30.1 v41,29.6
N$30  (via drill 0.25)
  Top 0.152: v38.75,39.85 38.5,39.85 36.75,38.1 R15.1 | v40.25,41.85 41.75,43.35 62.75,43.35 64.25,44.85 64.75,44.85 D2.C 65,45.1 v67,45.1 | v70.25,41.35 78.75,41.35 79,41.6 6N137S.2
  Bottom 0.152: v38.75,39.85 40.25,41.35 v40.25,41.85 | v70.25,41.35 67.5,44.1 67.5,44.6 v67,45.1
N$32  (via drill 0.25)
  Top 0.152: R12.2 70.75,33.35 76.25,33.35 78,35.1 v81.5,35.1 | v87.5,41.1 88.25,41.85 88.5,41.85 6N137S.7
  Bottom 0.152: v87.5,41.1 v81.5,35.1
N$38  (via drill 0.25)
  Top 0.152: v33,20.85 21.5,20.85 21,21.35 U6.4 | v37.25,20.85 37,20.6 36.25,20.6 C11.2
  Bottom 0.152: v37.25,20.85 v33,20.85
N$42  (via drill 0.25)
  Top 0.152: v43.25,8.1 43.25,6.85 J1.A5 | v45.5,10.85 46.5,11.85 R9.1
  Bottom 0.152: v43.25,8.1 45.5,10.35 v45.5,10.85
OUTL
  Top 0.152: R20.2 69,39.1 67.75,40.35 66.5,40.35 63.75,43.1 63.75,43.85 67.5,43.85 68,44.35 68.75,44.35 U3.6
PCLK  (via drill 0.25)
  Top 0.152: v48.25,45.35 X2.11 | v44.25,27.6 44,27.35 v18,27.35 | v15.75,36.6 14.5,35.35 U1.22
  Bottom 0.152: v48.25,45.35 48.5,45.1 48.5,41.1 44.25,36.85 v44.25,27.6 | v18,27.35 15.75,29.6 v15.75,36.6
PWM  (via drill 0.25)
  Top 0.152: X2.6 50.75,46.85 v51,46.85 | v22.75,53.1 v46.75,53.1 | v12.75,43.1 12.5,42.85 4.25,42.85 U1.9
  Bottom 0.152: v51,46.85 50.5,47.35 50.5,49.35 v46.75,53.1 | v12.75,43.1 v22.75,53.1
R5  (via drill 0.25)
  Top 0.152: X2.31 38.25,45.85 v26,45.85 | v19,45.35 5.75,45.35 4.5,46.6 4.25,46.6 U1.6
  Bottom 0.152: v26,45.85 23,48.85 22.25,48.85 22.25,48.6 v19,45.35
R6  (via drill 0.25)
  Top 0.152: v38.75,46.85 X2.30 | v2.75,46.35 3.75,45.35 4,45.35 U1.7
  Bottom 0.152: v38.75,46.85 37.75,47.85 37.75,53.85 37.25,54.35 2.75,54.35 v2.75,46.35
R7  (via drill 0.25)
  Top 0.152: v39.25,46.35 X2.29 | v36.5,49.1 36.25,49.35 v22.75,49.35 | v17,44.1 4.25,44.1 U1.8
  Bottom 0.152: v39.25,46.35 36.5,46.35 v36.5,49.1 | v22.75,49.35 22,49.35 22,49.1 v17,44.1
ROUT  (via drill 0.25)
  Top 0.152: AUDIO_CONN.3 86,3.85 88.75,3.85 AUDIO_CONN.5 89,4.1 89,9.35 89.75,10.1 89.75,19.85 75.25,19.85 74.5,20.6 v67.5,20.6 62.25,20.6 60.75,22.1 C32.1 | v70.25,37.6 70.75,37.6 72,38.85 R19.1
  Bottom 0.152: v70.25,37.6 67.5,34.85 v67.5,20.6
SCL  (via drill 0.25)
  Top 0.152: X2.3 52.25,43.85 41,43.85 40,42.85 v37.75,42.85 | v35.25,40.35 33,38.1 32.25,38.1 R14.2 | v16.75,41.35 4.25,41.35 U1.10 | v33.5,33.1 v22,33.1
  Bottom 0.152: v35.25,40.35 36.25,41.35 | 36.25,41.35 v37.75,42.85 | v16.75,41.35 22,36.1 v22,33.1 | v33.5,33.1 33.5,41.1 33.75,41.35 36.25,41.35
SDA  (via drill 0.25)
  Top 0.152: v51.75,44.6 X2.4 | v50,42.85 48.5,41.35 38.75,41.35 R13.2 38.5,41.35 36.75,43.1 v32,43.1 | v14.25,40.85 4.75,40.85 4.25,40.35 U1.11
  Bottom 0.152: v50,42.85 v51.75,44.6 | v14.25,40.85 16.5,43.1 16.5,44.35 24.75,52.6 26.75,52.6 26.75,50.85 32,45.6 v32,43.1
UART0_RXD  (via drill 0.25)
  Top 0.152: v23,24.1 21,24.1 U6.2 | v23,47.35 22.5,47.85 21.75,47.85 U1.36
  Bottom 0.152: v23,47.35 v23,24.1 23,0.6 62.5,0.6 74.25,12.35 74.25,14.1 80.5,20.35 80.5,34.85 85.5,39.85 85.5,53.6 83.75,53.6 83,52.85 83,50.85 80.5,50.85 79.25,52.1 J2.6
UART0_TXD  (via drill 0.25)
  Top 0.152: v22,22.85 21,22.85 U6.3 | U1.37 21.75,49.1 22,49.1 v22.75,48.35 32,48.35 v32.25,48.6 | v37.25,53.6 75.25,53.6 76.5,52.35 J2.5
  Bottom 0.152: v22,22.85 22.5,23.35 22.5,48.1 v22.75,48.35 | v32.25,48.6 v37.25,53.6
VBATT  (via drill 0.25)
  Top 0.152: 38.5,13.1 40.25,14.85 46,14.85 C12.1 | 38.5,13.1 38.25,12.85 IC1.3 | BOOST.1 54.25,27.1 52.75,28.6 47.75,28.6 47.25,29.1 v46,29.1 31.75,29.1 30,30.85 R23.1 30,31.1 v31,32.1 | v31.75,39.85 C14.2 | v46,37.85 46,39.35 L2.P$1 | v26.5,10.6 BATTERY.1 | 38.5,13.1 37.75,13.85 v35.5,13.85
  Bottom 0.152: v31.75,39.85 31,39.1 v31,32.1 30.5,31.6 30.5,14.6 29.75,13.85 | v46,29.1 v46,37.85 | 29.75,13.85 v26.5,10.6 | 29.75,13.85 v35.5,13.85
VNEG  (via drill 0.25)
  Top 0.152: v67,44.35 67.75,45.1 68.75,45.1 U3.5 | v67,26.35 67,25.1 66.75,25.1 C23.1
  Bottom 0.152: v67,26.35 v67,44.35
VSYNC  (via drill 0.25)
  Top 0.152: X2.8 49.75,44.35 v48,44.35 | v40,44.6 39.75,44.85 22,44.85 21.75,45.1 U1.34
  Bottom 0.152: v48,44.35 43.75,40.1 43.75,26.6 43,25.85 40.5,25.85 40.5,40.85 40.75,41.1 40.75,43.85 v40,44.6

## Text on the board
tNames: tulip.computer v4r3
tValues: Close
Measures: All dimensions in inches | Units: Inches